# Altium PCB PCB1.PcbDoc
Units mil, origin at the board's own origin, x right, y up, seen from the top; angles counter-clockwise.
Board outline 3260.03 x 3275.03 mil, 2 copper layers (Top Layer, Bottom Layer); 30 components, 39 nets, 170 pads, 24 vias.
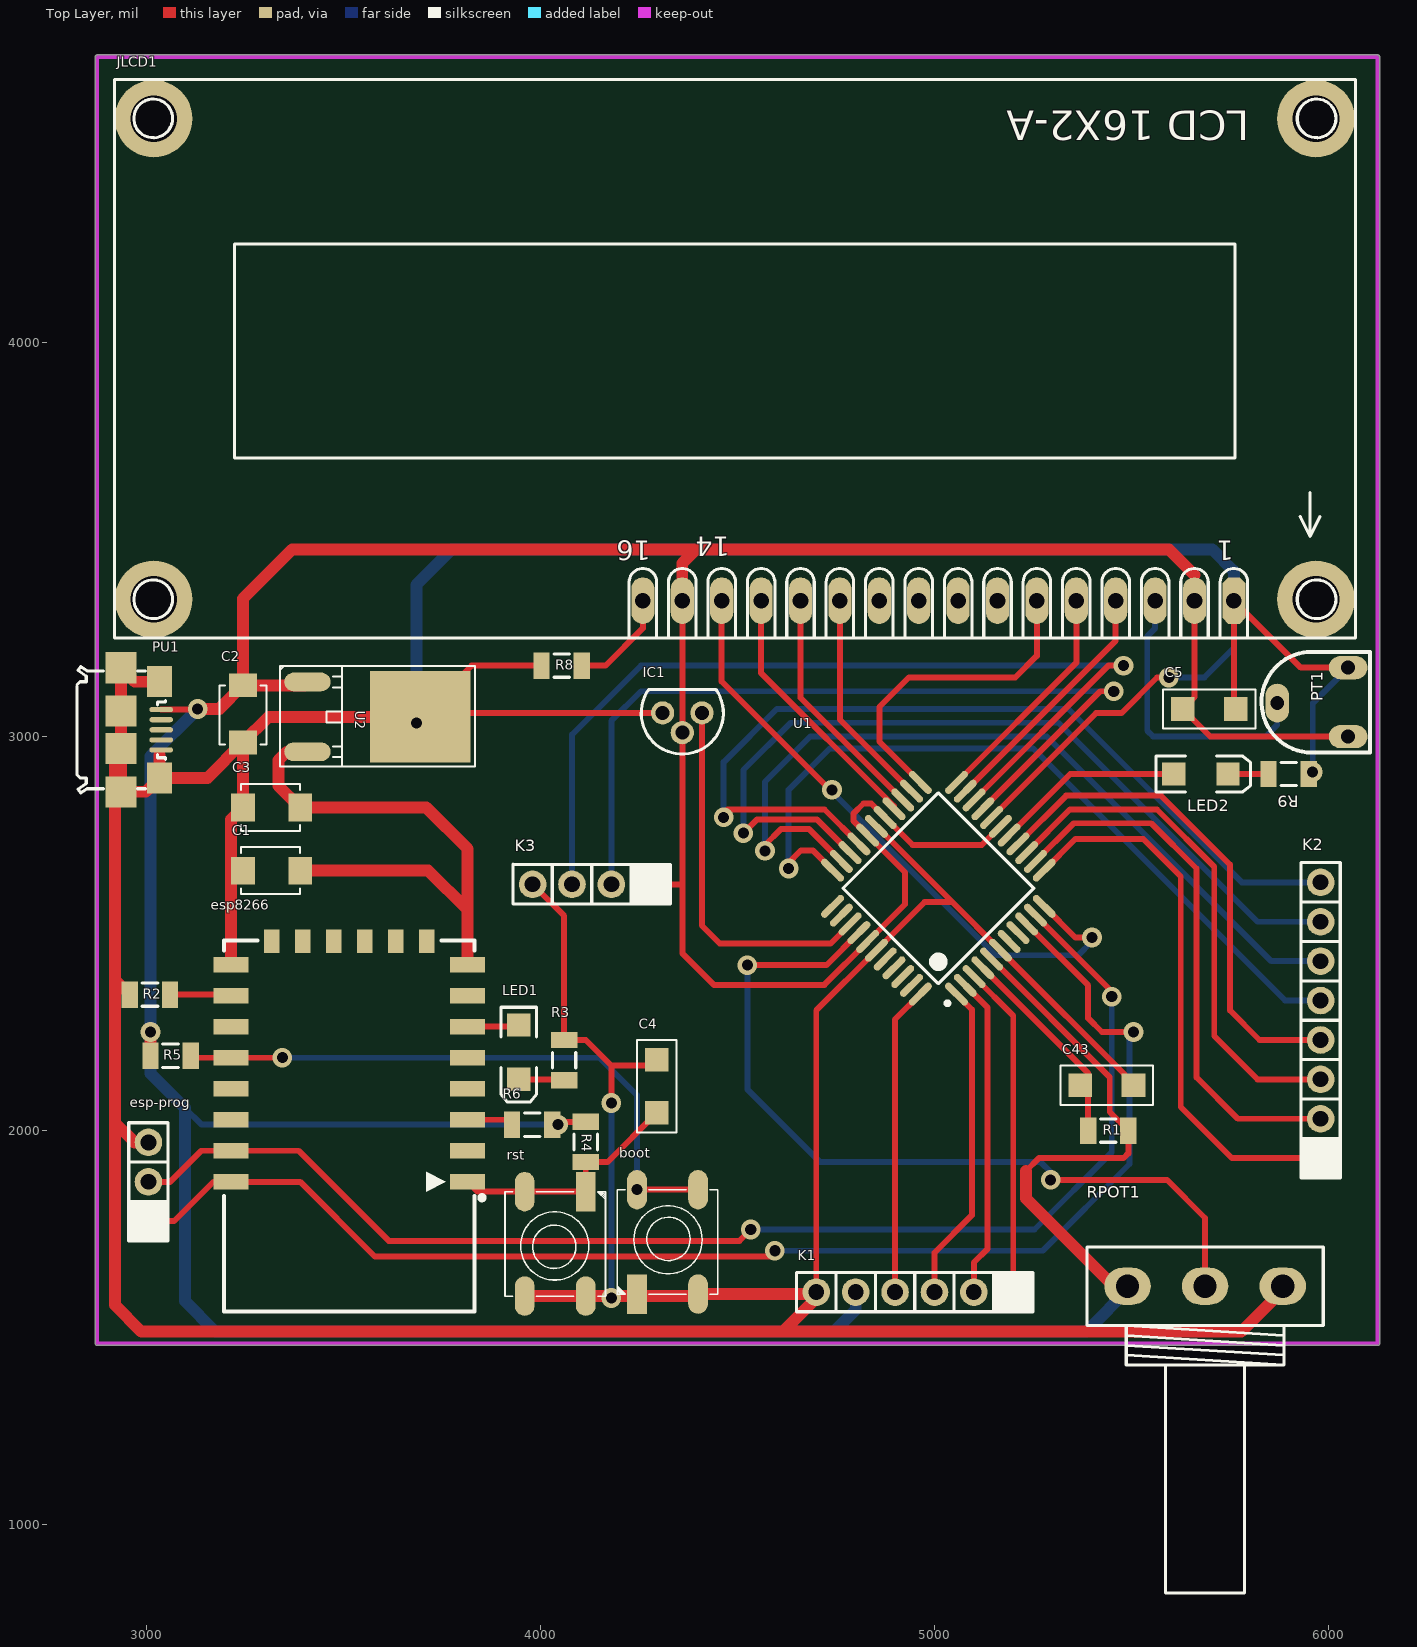
[diagram p0: Top Layer view]
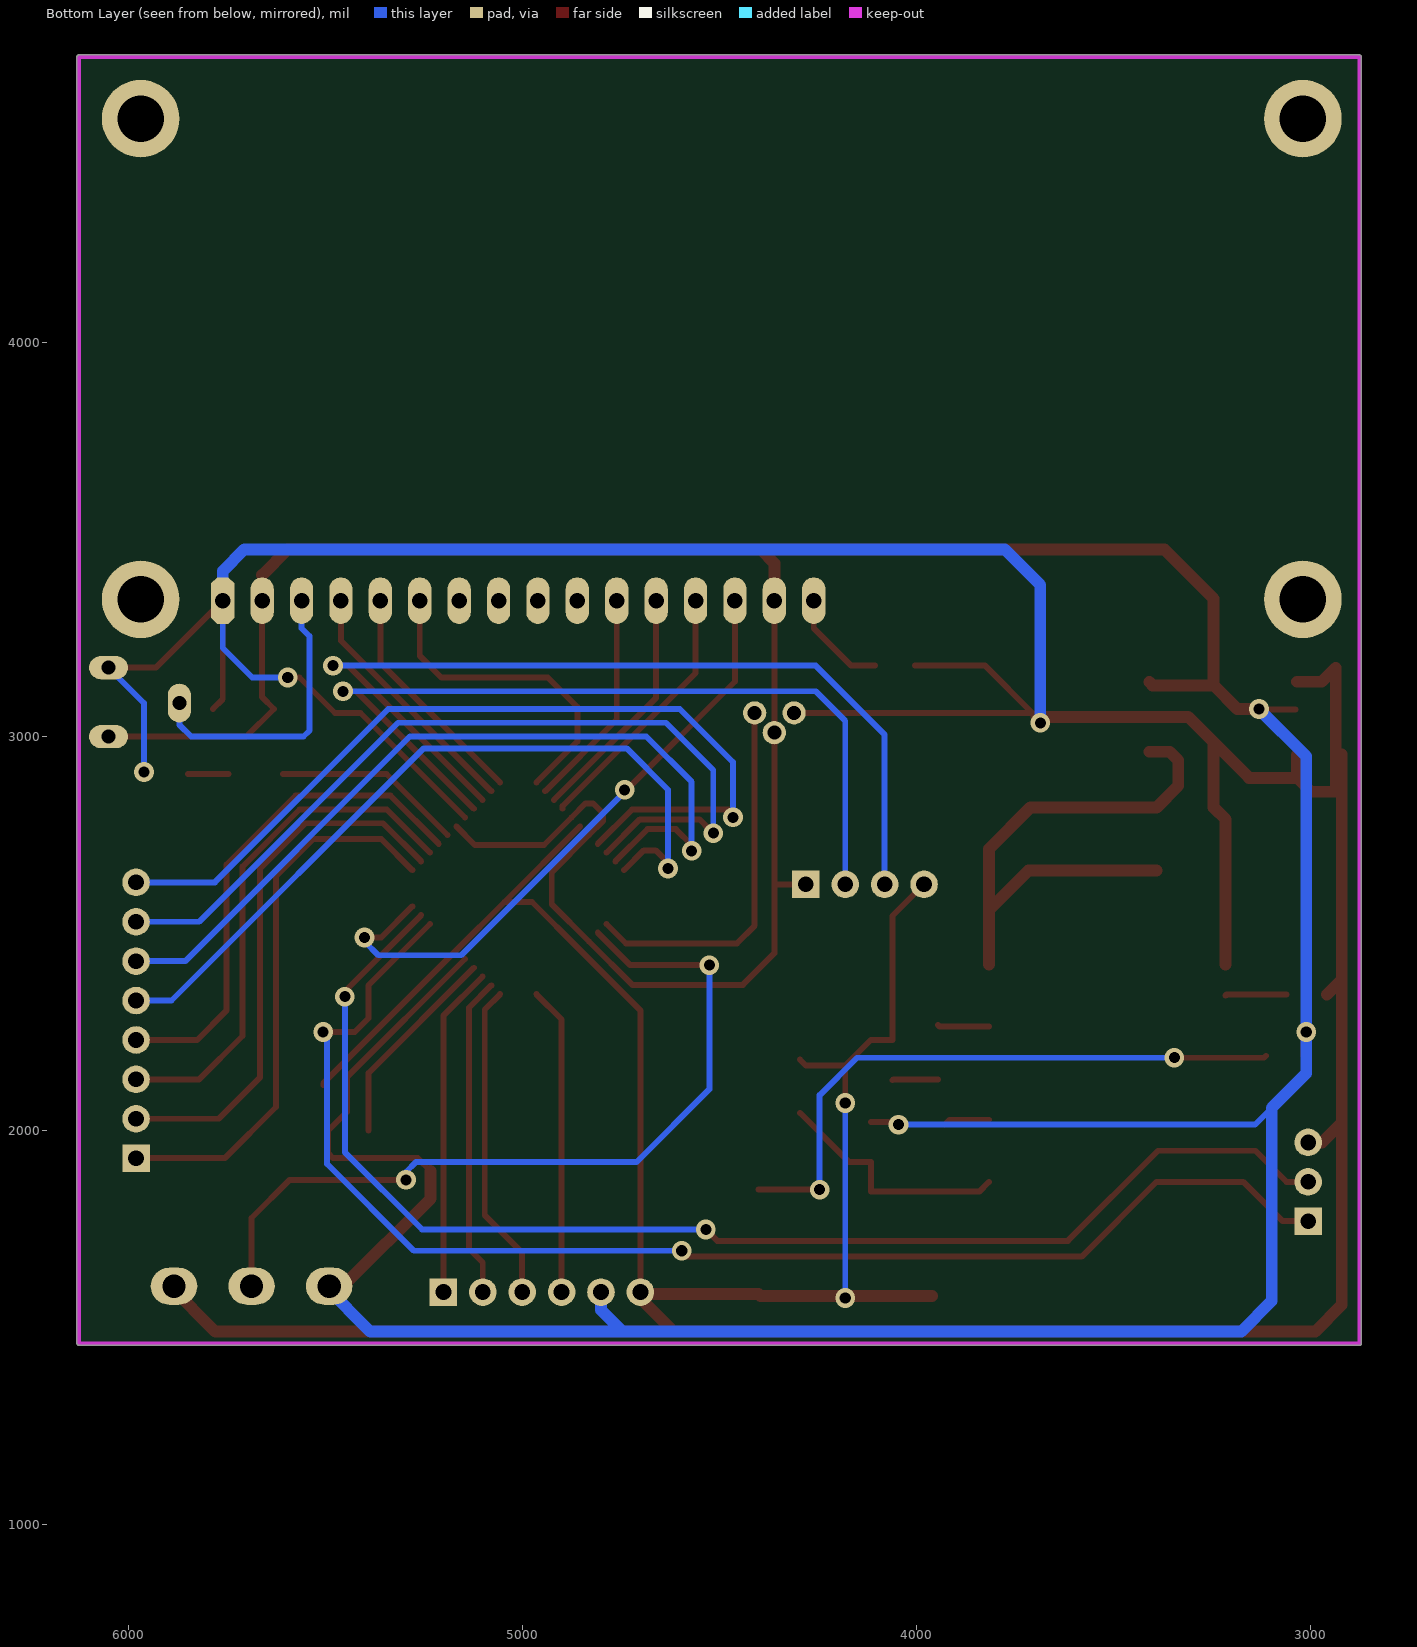
[diagram p1: Bottom Layer view, seen from below]
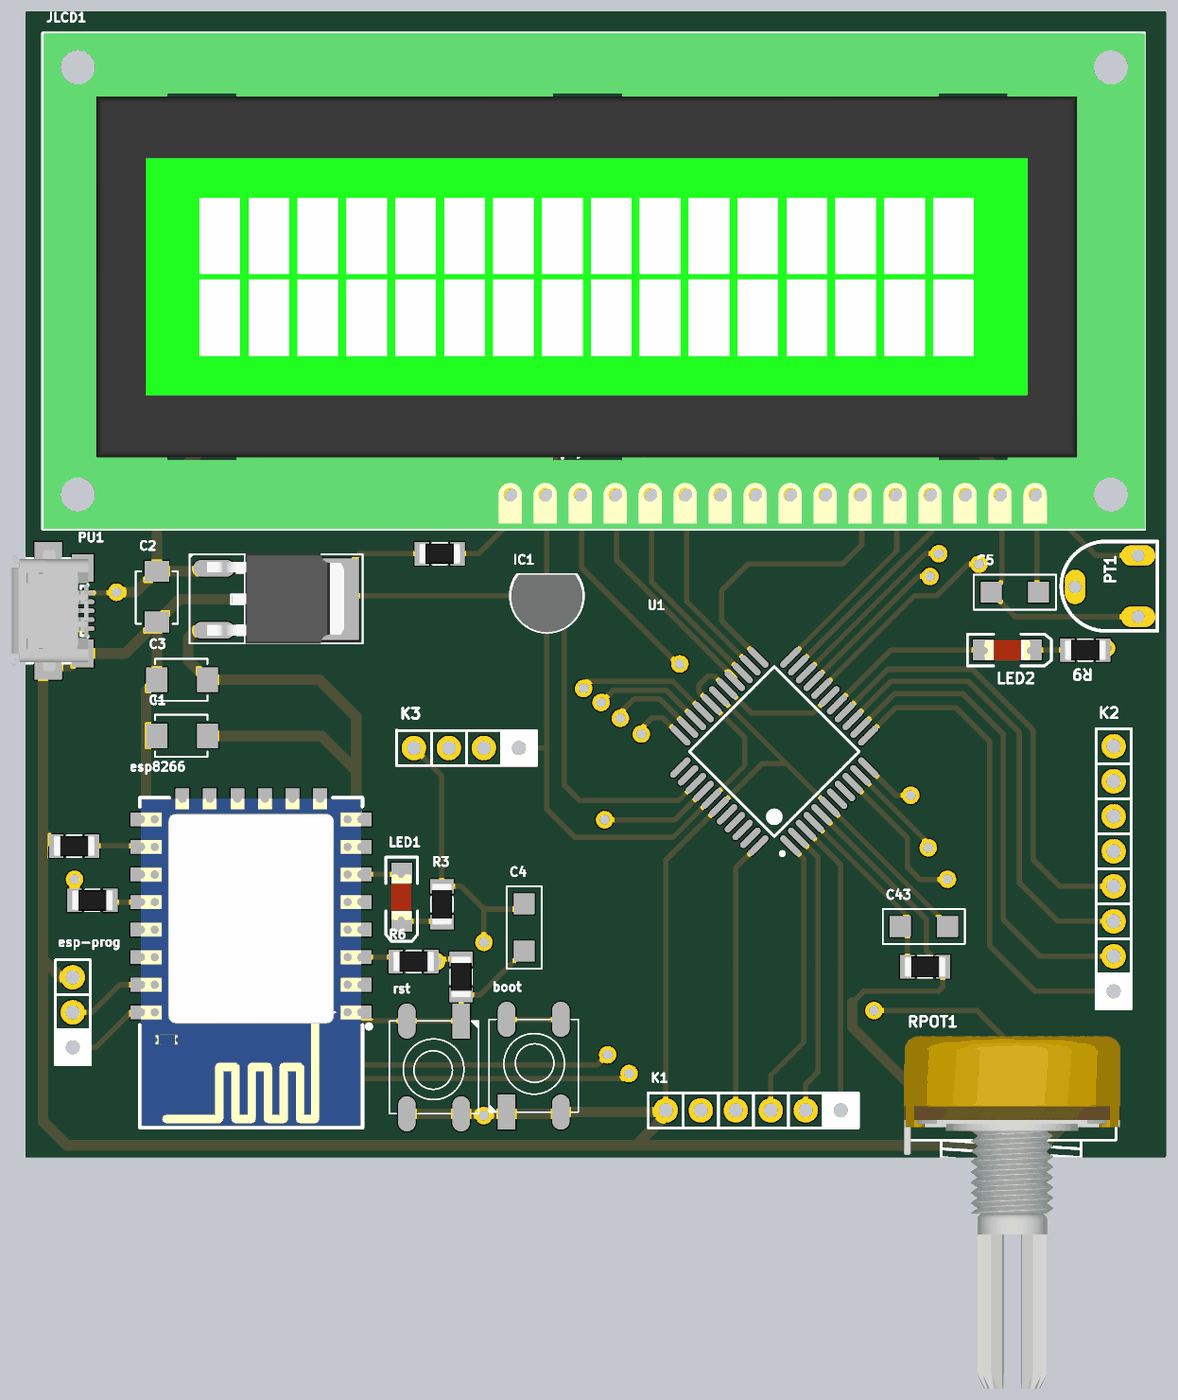
[diagram p2: 3D render of the assembled board from above, using the file's embedded part models]

## Layer stack, top to bottom
Top Solder: solder mask 0.4, Solder Resist, Dk 3.5
Top Layer: signal copper 1.4
Dielectric 1: dielectric 12.6, FR-4, Dk 4.8
Bottom Layer: signal copper 1.4
Bottom Solder: solder mask 0.4, Solder Resist, Dk 3.5

## Board outline
2869.98,1460 ccw(c2875,1460) 2875,1454.98 6125,1454.98 ccw(c6125,1460) 6130.01,1460 6130.02,4725 ccw(c6125,4725) 6125,4730.02 2875,4730.02 ccw(c2875,4725) 2869.99,4725

## Design rules (kind name [scope] priority, off if disabled: settings)
Clearance [All] p1: gap=10 ignorepadtopadclearanceinfootprint=FALSE except(0: Arc-Hole Track-Hole SMDPad-Hole THPad-Hole Via-Hole Fill-Hole Poly-Hole Region-Hole Text-Hole)
PolygonConnect [All] p1: connectstyle=Relief reliefconductorwidth=10 reliefentries=4 polygonreliefangle="90 Angle" airgapwidth=10
RoutingVias [All] p1: holewidth=28 width=50 viastyle="Through Hole" minholewidth=28 minwidth=50 maxholewidth=28 maxwidth=50
SolderMaskExpansion [All] p1: expansion=4
Width [All] p1: maxlimit=30 minlimit=10 preferedwidth=20
30 further rules are at their usual default settings.

## Components (designator, comment, footprint, x,y, rotation, side; value= is the part's Value field where it differs from the comment)
boot "SW-PB-BLACK-SMD" SW-PB-SMD 4245,1585 r90 top
C1 "10uF" CAP-B 3315,2660 r180 top
C2 "10uF" CAP-B 3245,3055 r270 top
C3 "10uF" CAP-B 3315,2820 r180 top
C4 "2U2" 1206C-GENERIC 4295,2045 r90 top
C5 "2U2" 1206C-GENERIC 5765,3070 r180 top
C43 "2U2" 1206C-GENERIC 5505,2115 r180 top
esp8266 "ESP_12_E" ESP_12_E 3829.76,1870 r180 top
esp-prog "HEADER-1X3" HEADER-1X3 3005,1770 r180 top
IC1 "LM35CZ/NOPB" TO-92AA-P127 4360,3060 r180 top
JLCD1 "LCD2X16_Alphanumeric" LCD_2X16 4600,3986.73 r180 top
K1 "HEADER-1X6" HEADER-1X6 5200,1590 r270 top
K2 "HEADER-1X8" HEADER-1X8 5980,1930 r180 top
K3 "HEADER-1X4" HEADER-1X4 4280,2625 r270 top
LED1 "Red" "LED SMD 1206" 3945,2198.9 r270 top
LED2 "Red" "LED SMD 1206" 5676.1,2905 r0 top
PT1 "POT3" POT3 6105,2960 r90 top
PU1 "USB_MICRO_AB" UUSB_AB_BM_SHS 2986.18,3017.24 r90 top
R1 "1K" "RES 1206 (3216X08L)" 5492.2,2000 r180 top
R2 "1K" "RES 1206 (3216X08L)" 2957.8,2345 r0 top
R3 "270" "RES 1206 (3216X08L)" 4060,2230 r270 top
R4 "1K" "RES 1206 (3216X08L)" 4115,2022.2 r270 top
R5 "1K" "RES 1206 (3216X08L)" 3010,2190 r0 top
R6 "1K" "RES 1206 (3216X08L)" 4030,2015 r180 top
R8 "1K" "RES 1206 (3216X08L)" 4002.8,3180 r0 top
R9 "1K" "RES 1206 (3216X08L)" 5950,2905 r180 top
RPOT1 "POT10K" VOL_R 5686.85,1605 r0 top
rst "SW-PB-BLACK-SMD" SW-PB-SMD 4115,1845 r270 top
U1 "ATmega32A-ANR" 44A_N 5010,2615 r135 top
U2 "LF33CDT" DPAK 3408.58,3138.58 r0 top

## Footprints (in the part's own frame and the unit in brackets; to place one, negate y for a bottom-side part, rotate by r counter-clockwise, add the part's x,y. Pads: shape width x height; smd on the part's side, far side on the other; paste and mask are expansions set on the pad)
44A_N [mm] "Thin QFP, 44-Leads, Body 10x10mm, Pitch 0.8mm, IPC Medium Density"
  oval 1.905x0.457 smd: 1(-5.65,4) 2(-5.65,3.2) 3(-5.65,2.4) 4(-5.65,1.6) 5(-5.65,0.8) 6(-5.65,0) 7(-5.65,-0.8) 8(-5.65,-1.6) 9(-5.65,-2.4) 10(-5.65,-3.2) 11(-5.65,-4) 23(5.65,-4) 24(5.65,-3.2) 25(5.65,-2.4) 26(5.65,-1.6) 27(5.65,-0.8) 28(5.65,0) 29(5.65,0.8) 30(5.65,1.6) 31(5.65,2.4) 32(5.65,3.2) 33(5.65,4)
  oval 0.457x1.905 smd: 12(-4,-5.65) 13(-3.2,-5.65) 14(-2.4,-5.65) 15(-1.6,-5.65) 16(-0.8,-5.65) 17(0,-5.65) 18(0.8,-5.65) 19(1.6,-5.65) 20(2.4,-5.65) 21(3.2,-5.65) 22(4,-5.65) 34(4,5.65) 35(3.2,5.65) 36(2.4,5.65) 37(1.6,5.65) 38(0.8,5.65) 39(0,5.65) 40(-0.8,5.65) 41(-1.6,5.65) 42(-2.4,5.65) 43(-3.2,5.65) 44(-4,5.65)
  silkscreen extent -5.77,-4.35 4.35,4.95, body extent -5,-5 5,5, height 1.2
1206C-GENERIC [mil]
  rect 60x60 smd: 1(0,0) 2(135,0)
  silkscreen extent -50,-50 185,50, body extent -8,-29 147,29, height 46
CAP-B [mil] "Capacitor Tantalum Case B"
  rect 60x70 smd: 1(-75,0) 2(70,0)
  silkscreen extent -75,-60 75,60, body extent -72,-55 72,55, height 75
DPAK [mm]
  oval 3x1.2 smd: 1(0,0) 3(0,-4.5)
  rect 6.5x5.9 smd: 2(7.275,-2.25)
  silkscreen extent -1.78,-5.46 10.79,1.02, body extent -0.5,-5.48 9.44,1.06, height 2.41
ESP_12_E [mm] "ESP-12 Wi-Fi Module by AI-Thinker"
  rect 2.25x1 smd: 1(0.375,0) 2(0.375,-2) 3(0.375,-4) 4(0.375,-6) 5(0.375,-8) 6(0.375,-10) 7(0.375,-12) 8(0.375,-14) 15(15.625,-14) 16(15.625,-12) 17(15.625,-10) 18(15.625,-8) 19(15.625,-6) 20(15.625,-4) 21(15.625,-2) 22(15.625,0)
  rect 1x1.5 smd: 9(3,-15.5) 10(5,-15.5) 11(7,-15.5) 12(9,-15.5) 13(11,-15.5) 14(13,-15.5)
  silkscreen extent -0.7,-15.57 16.08,8.37, body extent 0,-15.5 16,8.5, height 2.25
HEADER-1X3 [mil]
  rect 70x70 hole 40: 1(0,0)
  round 70 hole 40: 2(0,-100) 3(0,-200)
  silkscreen extent -50,-250 50,50, body extent -50,-250 50,50, height 470
HEADER-1X4 [mil]
  rect 70x70 hole 40: 1(0,0)
  round 70 hole 40: 2(0,-100) 3(0,-200) 4(0,-300)
  silkscreen extent -51,-350 50,50, body extent -50,-350 50,50, height 470
HEADER-1X6 [mil]
  rect 70x70 hole 40: 1(0,0)
  round 70 hole 40: 2(0,-100) 3(0,-200) 4(0,-300) 5(0,-400) 6(0,-500)
  silkscreen extent -50,-550 50,50, body extent -50,-550 50,50, height 470
HEADER-1X8 [mil]
  rect 70x70 hole 40: 1(0,0)
  round 70 hole 40: 2(0,-100) 3(0,-200) 4(0,-300) 5(0,-400) 6(0,-500) 7(0,-600) 8(0,-700)
  silkscreen extent -50,-750 50,50, body extent -50,-750 50,50, height 470
LCD_2X16 [mm] "LCD"
  oct 1.5x3 hole 1: 1(-29.464,16.3)
  oval 1.5x3 hole 1: 2(-26.924,16.3) 3(-24.384,16.3) 4(-21.844,16.3) 5(-19.304,16.3) 6(-16.764,16.3) 7(-14.224,16.3) 8(-11.684,16.3) 9(-9.144,16.3) 10(-6.604,16.3) 11(-4.064,16.3) 12(-1.524,16.3) 13(1.016,16.3) 14(3.556,16.3) 15(6.096,16.3) 16(8.636,16.3)
  round 5 hole 3: ""(-34.756,-14.775) ""(-34.756,16.213) ""(40.174,-14.775) ""(40.174,16.213)
  silkscreen extent -37.3,-17.29 42.7,18.71, body extent -37.35,-17.3 42.65,18.7, height 11.5
"LED SMD 1206" [mm]
  rect 1.5x1.5 smd: 1(-1.75,0) 2(1.75,0)
  silkscreen extent -2.9,-1.15 3.2,1.15, body extent -1.65,-0.76 1.65,0.69, height 1.36
POT3 [mm]
  oval 1.5x2.5 hole 0.9: 1(1.016,1.397) 2(5.461,1.397)
  oval 2.5x1.5 hole 0.9: 3(3.175,5.969)
  silkscreen extent 0,0 6.48,6.98
"RES 1206 (3216X08L)" [mm] "Chip Resistor, 2-Leads, Body 3.2x1.6mm, IPC High Density _ (0.125 W)"
  rect 1.05x1.7 smd: 1(0,0) 2(2.596,0)
  silkscreen extent 0.8,-0.75 1.8,0.75, body extent -0.23,-0.76 2.82,0.76, height 0.6
SW-PB-SMD [mil]
  rect 100x50 smd: 1(0,0)
  oval 100x50 smd: 2(265,-155) 3(0,-155) 4(265,0)
  silkscreen extent 0,-205 265,50, body extent -28,-206 297,50, height 140
TO-92AA-P127 [mm] "TO-92 (TO-226),  Pitch 1.27mm, Flat Index, 3 In-Line, Axial Leads, Body Dia. 5.3mm, Leads Dia. 0.5mm (max)"
  round 1.5 hole 0.9: 1(-1.27,0) 2(0,1.27) 3(1.27,0)
  silkscreen extent -2.65,-1.52 2.65,2.65, body extent -2.58,-1.53 2.58,2.64, height 9.33
UUSB_AB_BM_SHS [mm] "USB Micro AB - Standard (Bottom mount), Shell SMT"
  oval 0.33x1.524 smd: 1(1.3,-1.3) 2(0.65,-1.3) 3(0,-1.3) 4(-0.65,-1.3) 5(-1.3,-1.3)
  rect 2x1.6 smd: 6(-3.1,-1.2) 11(3.1,-1.2)
  rect 2x2 smd: 7(-4,1.3) 8(-1.2,1.3) 9(1.2,1.3) 10(4,1.3)
  silkscreen extent -4.08,-1.57 4.08,4.13, body extent -4.4,-1.61 4.4,3.99, height 2.78
VOL_R [mm] "VOULME RIGHT ANGLE"
  oval 3x2.4 hole 1.5: 1(5,0) 2(0,0) 3(-5,0)
  silkscreen extent -7.62,-19.78 7.62,2.54, body extent -7.8,-20.56 7.95,5, height 20.64

## Part data
boot rst: "PUSHBUTTON SWITCH 6MM SMD"
C1 C2 C3: library part cap, "tantalium capacitor", Voltage=16V
C4 C5 C43: library part 1206C-2U2-50V, "CAPACITOR 0603 CERAMIC", Supplier Part Number 1=490-4796-2-ND, REEL=C100, Supplier 1=Digi-Key
esp8266: "ESP-12 Wi-Fi Module by AI-Thinker", IC=ESP8266-EX, Vendor=Ai-thinker
esp-prog K1 K2 K3: Supplier Part Number 1=S1011E-36-ND, Supplier 1=Digi-Key
IC1: "Precision Centigrade Temperature Sensor", Case=TO-92, Manufacturer="NATIONAL SEMICONDUCTOR", Author="CERN DEM JLC", ComponentHeight=7.49mm, Component Type=Standard, CreateDate=1/25/2012, Device=LM35CZ/NOPB, HelpURL=\\cern.ch\dfs\Applications\Altium\Datasheets\LM35CZ-NOPB.pdf, LatestRevisionDate=7/16/2012, Manufacturer Part Number=LM35CZ/NOPB, Mounted=Yes, PackageDescription="TO-92 (TO226), Pitch 1.27mm, Flat Index, 3 In-Line, Bent Leads, Body Dia. 5.3mm", Part Description="-55° to +150°C ±0.4°C Precision Centigrade Temperature Sensors", Part Number=LM35CZ/NOPB, Pin Count=3, SMD=No, Socket=No, Table=Sensors
LED1 LED2: library part LED, "LED", Adding Date=1387/12/22, Color=Red, Designer="Saeid Jorablo", Organazation=ControTec, Size="SMD 1206"
PT1: "Variable Potentiometer top adjust", Designer="Seyed Mohsen Ghasemian", WEB=www.picpars.com
R1 R2 R3 R4 R5 R6 R8 R9: library part Resistor, "Resistor", Power="1/8 W", Tolerance=5%
RPOT1: library part RPot, "Potentiometer", LatestRevisionDate=17-Jul-2002, LatestRevisionNote="Re-released for DXP Platform.", PackageDescription="Variable Resistor, Thru-Hole; 3 Leads", PackageReference=VR5, Published=8-Jun-2000, Publisher="Altium Limited", Set Position=0.5, Sim Note="Enter the Resistance value and the set point into parameter fields."
U1: "8-bit AVR Microcontroller, 2.7-5.5V, 16MHz, 32KB Flash, 1KB EEPROM, 2KB SRAM, 44-pin TQFP, Extended Grade (-40°C to 105°C), Reel", Code_JEDEC=MS-026-ACB, ComponentLink1Description="Manufacturer URL", ComponentLink1URL=http://www.atmel.com/, ComponentLink2Description="ATmega32A Datasheet", ComponentLink2URL=http://www.atmel.com/dyn/resources/prod_documents/doc8155.pdf, ComponentLink3Description="ATmega32A Summary", ComponentLink3URL=http://www.atmel.com/dyn/resources/prod_documents/8155S.pdf, DatasheetVersion="revC, Feb-2011", PackageDescription="44-Pin Plastic Thin Profile Quad Flat Pack, 10 x 10 x 1.0 mm Body, 0.8 mm Pitch (TQFP)", PackageReference=44A, PackageVersion="revC, Oct-2010"
U2: "Low Drop Voltage Regulator 3.3V", Text Field1=ST, Text Field2=LF33CDT, Text Field3=Mouser, Text Field4=511-LF33CDT, Text Field5=DPAK, Text Field6=0.57

## Via types
v1: diameter 50, hole 28, Top Layer to Bottom Layer, 24 vias

## Nets (pads, with @x,y where several pads share a name; then routed paths per layer and width w, separated by ;. In a path a pad name is that pad's centre, name@x,y a point inside that pad or via, vN(x,y) a via of type N, cw(c..) or ccw(c..) an arc to the next point about the centre after c; other vN are vias at no path point)
3v3: C1.1 C3.1 esp8266.8 U2.3 | length 1454
  Top Layer w30: C1.1 3715,2660 3815,2560 ; U2.3 3356.42,2961.42 3335,2940 3335,2875 C3.1 3710,2820 3815,2715 3815,2560 ; esp8266.8 3815,2560
en: esp8266.3 R6.2 | length 118
  Top Layer w15: esp8266.3 3915.32,2027.48 R6.2
GND: boot.1 C1.2 C2.2 C3.2 C4.2 C5.1 C43.1 esp8266.15 esp-prog.3 IC1.3 JLCD1.1 K1.6 K3.4 PT1.2 PU1.5 PU1.6 PU1.7 PU1.8 PU1.9 PU1.10 PU1.11 R2.1 R3.1 R8.1 R9.1 RPOT1.1 rst.2 U1.6 U1.18 U1.28 U1.39 U2.2 | length 16166.7
  Top Layer w15: U2.2 U2.2@3705,3060 ; K3.4 4060,2545 R3.1 4115,2230 4180,2165 ; R8.1 3825,3180 U2.2@3705,3060 ; v1(4180,2070) 4180,2165 ; C4.2 4280,2165 4180,2165 ; IC1.3 U2.2@3705,3060 ; K1.6 4700,2305 U1.39 4975,2580 5045,2580 ; U1.28 5045,2580 ; U1.18 5410.46,3060 5475,3060 5565,3150 v1(5595,3150) ; C43.1 5505,2120 U1.6 5045,2580 ; C5.1@5785,3070 5760,3095 JLCD1.1 5930,3175 PT1.2
  Top Layer w30: PU1.8@2920,2955 2920,2382.8 ; R2.1 2920,2382.8 ; esp-prog.3 2970,1970 2920,2020 ; 3033.43,2953.43 PU1.6 ; PU1.11 2970.43,3139.29 PU1.10 PU1.9 PU1.8 PU1.7 2997.99,2859.76 PU1.6 ; esp8266.15 3214.61,2789.61 C3.2 C2.2 ; U2.2 3310,3050 C2.2 ; rst.2 4395,1580 4400,1585 4695,1585 K1.6 4700,1575 4615,1490 ; RPOT1.1@5893.7,1605 5778.7,1490 4615,1490 ; 2920,2020 2920,2382.8 ; 2920,2020 2920,1557.34 2987.34,1490 4615,1490 ; PU1.6 3155.2,2895.2 C2.2
  Bottom Layer w15: v1(4180,1575) 4175,1580 4180,1585 v1(4180,2070) ; v1(5595,3150) 5685,3150 5760,3225 JLCD1.1 ; v1(5960,2910) 5960,3085 PT1.2
  Bottom Layer w30: v1(3685,3035) 3685,3385 3775,3475 5705,3475 5760,3420 JLCD1.1
gpio0: boot.2 esp8266.18 R5.2 | length 1569.2
  Top Layer w15: R5.2 3117.24,2184.96 esp8266.18 v1(3344.96,2184.96) ; v1(4245,1850) boot.2
  Bottom Layer w15: v1(3344.96,2184.96) 4150.04,2184.96 4245,2090 v1(4245,1850)
n1: K2.5 U1.33 | length 2010.7
  Top Layer w15: v1@4625,2675 4661.14,2711.14 4691.14,2711.14 U1.33
  Bottom Layer w15: v1(4630,2665) 4630,2865 4735,2970 5250,2970 5890,2330 K2.5
n2: K2.6 U1.32 | length 2112.8
  Top Layer w15: v1@4570,2725 4610,2765 4681.83,2765 U1.32
  Bottom Layer w15: v1(4570,2710) 4570,2885 4685,3000 5285,3000 5855,2430 K2.6
n3: K2.7 U1.31 | length 2190.1
  Top Layer w15: v1@4525,2765 4550,2790 4701.37,2790 U1.31
  Bottom Layer w15: v1(4515,2755) 4515,2915 4635,3035 5315,3035 5820,2530 K2.7
n4: K2.8 U1.30 | length 2290.8
  Top Layer w15: v1@4455,2795 4475,2815 4720.92,2815 U1.30
  Bottom Layer w15: v1(4465,2795) 4465,2935 4600,3070 5340,3070 5780,2630 K2.8
NetC43_2: C43.2 R1.2 U1.4 | length 523.9
  Top Layer w15: U1.4 5390,2145.92 R1.2
Netesp8266_6: esp8266.6 LED1.1 | length 131.7
  Top Layer w15: esp8266.6 3940.91,2263.7 LED1.1
Netesp8266_16: esp8266.16 R2.2 | length 155.7
  Top Layer w15: R2.2 3212.05,2345 esp8266.16
NetIC1_1: IC1.1 U1.36 | length 955.1
  Top Layer w15: IC1.1 4410,2520 4455,2475 4736.37,2475 U1.36
NetJLCD1_3: JLCD1.3 PT1.3 | length 741.9
  Bottom Layer w15: JLCD1.3 5560,3275 5540,3255 5540,3015 5555,3000 5840,3000 5870,3030 PT1.3
NetJLCD1_4: JLCD1.4 U1.21 | length 641.8
  Top Layer w15: U1.21 5460,3243.17 JLCD1.4
NetJLCD1_5: JLCD1.5 U1.22 | length 587.3
  Top Layer w15: U1.22 5360,3187.71 JLCD1.5
NetJLCD1_6: JLCD1.6 U1.23 | length 828.3
  Top Layer w15: U1.23 4860,2987.71 4860,3075 4935,3150 5205,3150 5260,3205 JLCD1.6
NetJLCD1_11: JLCD1.11 U1.24 | length 558.9
  Top Layer w15: JLCD1.11 4760,3043.17 U1.24
NetJLCD1_12: JLCD1.12 U1.25 | length 613.4
  Top Layer w15: JLCD1.12 4660,3098.63 U1.25
NetJLCD1_13: JLCD1.13 U1.26 | length 667.9
  Top Layer w15: JLCD1.13 4560,3161.15 4897.25,2823.9 U1.26
NetJLCD1_14: JLCD1.14 U1.11 | length 1604.4
  Top Layer w15: JLCD1.14 4460,3140 4735,2865 v1(4740,2865) ; U1.11 5357.71,2490 v1(5400,2490)
  Bottom Layer w15: v1(4740,2865) 4740,2860 5155,2445 5365,2445 v1@5400,2480
NetJLCD1_16: JLCD1.16 R8.2 | length 264.4
  Top Layer w15: R8.2 4165,3180 4260,3275 JLCD1.16
NetK1_1: K1.1 U1.3 | length 842.1
  Top Layer w15: U1.3 5200,2291.37 K1.1
NetK1_2: K1.2 U1.2 | length 816.6
  Top Layer w15: U1.2 5135,2311.83 5135,1700 5100,1665 K1.2
NetK1_3: K1.3 U1.1 | length 811.9
  Top Layer w15: K1.3 5000,1690 5095,1785 5095,2307.29 U1.1
NetK1_4: K1.4 U1.44 | length 782.9
  Top Layer w15: K1.4 4900,2282.29 U1.44
NetK2_1: K2.1 U1.12 | length 1412.3
  Top Layer w15: U1.12 5357.71,2740 5530,2740 5625,2645 5625,2060 5755,1930 K2.1
NetK2_2: K2.2 U1.13 | length 1384.8
  Top Layer w15: U1.13 5353.17,2780 5550,2780 5665,2665 5665,2135 5770,2030 K2.2
NetK2_3: K2.3 U1.14 | length 1326.9
  Top Layer w15: U1.14 5343.63,2815 5565,2815 5710,2670 5710,2240 5820,2130 K2.3
NetK2_4: K2.4 U1.15 | length 1292.4
  Top Layer w15: U1.15 5334.08,2850 5575,2850 5750,2675 5750,2305 5825,2230 K2.4
NetLED1_2: LED1.2 R3.2 | length 115.9
  Top Layer w15: LED1.2 4057.8,2130 R3.2
NetLED2_1: LED2.1 U1.16 | length 481.8
  Top Layer w15: U1.16 5344.54,2905 LED2.1
NetLED2_2: LED2.2 R9.2 | length 102.8
  Top Layer w15: LED2.2 R9.2
NetRPOT1_2: RPOT1.2 U1.37 | length 2104.3
  Top Layer w15: v1@4535,2420 4725.92,2420 U1.37 ; v1(5295,1875) 5590,1875 5686.85,1778.15 RPOT1.2
  Bottom Layer w15: v1(4525,2420) 4525,2105 4710,1920 5270,1920 5295,1895 v1(5295,1875)
rst: C4.1 esp8266.1 R4.2 rst.1 | length 617.1
  Top Layer w15: esp8266.1 3840,1845 3960,1845 rst.1 R4.2 4170,1920 C4.1
rxd: esp8266.21 esp-prog.2 U1.10 | length 3347.6
  Top Layer w15: esp-prog.2 3060,1870 3138.74,1948.74 esp8266.21 3386.26,1948.74 3615,1720 4505,1720 v1(4533.75,1748.75) ; U1.10 5450,2353.17 v1(5450,2340)
  Bottom Layer w15: v1(4533.75,1748.75) 5253.75,1748.75 5450,1945 v1(5450,2340)
scl: K3.2 U1.19 | length 2176.8
  Top Layer w15: U1.19 5420.92,3115 v1(5455,3115)
  Bottom Layer w15: K3.2 4180,2995 4180,3040 4255,3115 v1(5455,3115)
sda: K3.3 U1.20 | length 2373.2
  Top Layer w15: U1.20 5441.37,3180 v1(5480,3180)
  Bottom Layer w15: K3.3 4080,3005 4255,3180 v1(5480,3180)
txd: esp8266.22 esp-prog.1 U1.9 | length 3474.8
  Top Layer w15: esp-prog.1 3070,1770 3170,1870 esp8266.22 3390,1870 3580,1680 v1@4600,1680 ; U1.9 5390,2368.63 5390,2285 5425,2250 v1(5505,2250)
  Bottom Layer w15: v1(4595,1695) 5275,1695 5495,1915 v1@5495,2250
VCC: C2.1 C5.2 IC1.2 JLCD1.2 JLCD1.15 K1.5 K3.1 PT1.1 PU1.1 R1.1 R4.1 R5.1 R6.1 RPOT1.3 U1.5 U1.17 U1.27 U1.29 U1.38 U2.1 | length 13112
  Top Layer w15: PU1.1 3183.43,3068.43 ; v1(4045,2015) 4052.2,2022.2 R4.1 ; K3.1 4360,2625 ; JLCD1.15 IC1.2 4360,2625 ; U1.5 5445,2135.46 5445,2047.2 R1.1 5492.2,1942.2 5480,1930 5265,1930 5232.5,1897.5 ; U1.17 5120,2725 4944.54,2725 U1.27 4839.54,2830 4820,2830 4795,2805 4795,2785.46 U1.29 4925,2655.46 4925,2574.54 U1.38 4720.46,2370 4440,2370 4360,2450 4360,2625 ; 5660,3410 JLCD1.2 5660,3100 C5.2 5700,3000 PT1.1
  Top Layer w30: R5.1 v1@3010,2245 ; v1(3130,3070) 3185,3070 C2.1 ; U2.1 3400,3130 C2.1 ; JLCD1.15 4360,3440 4395,3475 ; 5232.5,1897.5 5232.5,1827.5 5455,1605 RPOT1.3 ; 5660,3410 5595,3475 4395,3475 ; C2.1 3245,3350 3370,3475 4395,3475
  Bottom Layer w15: 3097.5,2057.5 3140,2015 v1@4035,2015
  Bottom Layer w30: v1(3130,3070) 3010,2950 v1(3010,2250) 3010,2145 3097.5,2057.5 3097.5,1567.5 3175,1490 4745,1490 ; K1.5 4800,1545 4745,1490 ; RPOT1.3@5500,1605 5385,1490 4745,1490
pads on no net: boot.3 boot.4 esp8266.2 esp8266.4 esp8266.5 esp8266.7 esp8266.9 esp8266.10 esp8266.11 esp8266.12 esp8266.13 esp8266.14 esp8266.17 esp8266.19 esp8266.20 JLCD1. JLCD1.7 JLCD1.8 JLCD1.9 JLCD1.10 PU1.2 PU1.3 PU1.4 rst.3 rst.4 U1.7 U1.8 U1.34 U1.35 U1.40 U1.41 U1.42 U1.43

## Keep-outs
Keep-Out Layer:
  lines w10: 2875,1460 6125,1460 6125,4725 2875,4725 2875,1460

## Text inside footprints (layer, text, board x,y; h text height)
esp8266: Mechanical 13 "CUTOUT POLYGON" at 3824.76,1580 h10 r180; Mechanical 13 "ANTENNA AREA" at 3824.76,1560 h10 r180
JLCD1: Top Overlay "14" at 4480,3506.73 h50 r180; Top Overlay "1" at 5760,3496.73 h50 r180; Top Overlay "16" at 4280,3496.73 h50 r180; Top Overlay "LCD 16X2-A" at 5798.35,4588.43 h75 r180
PU1: Mechanical 1 "PCB EDGE" at 2864.13,2910.94 h31.5 r90